# Altium PCB CSB_PCB.PcbDoc
Units mm, origin at the board's own origin, x right, y up, seen from the top; angles counter-clockwise.
Board outline 161.92 x 104.01 mm, 2 copper layers (Top Layer, Bottom Layer); 52 components, 44 nets, 237 pads, 465 vias.
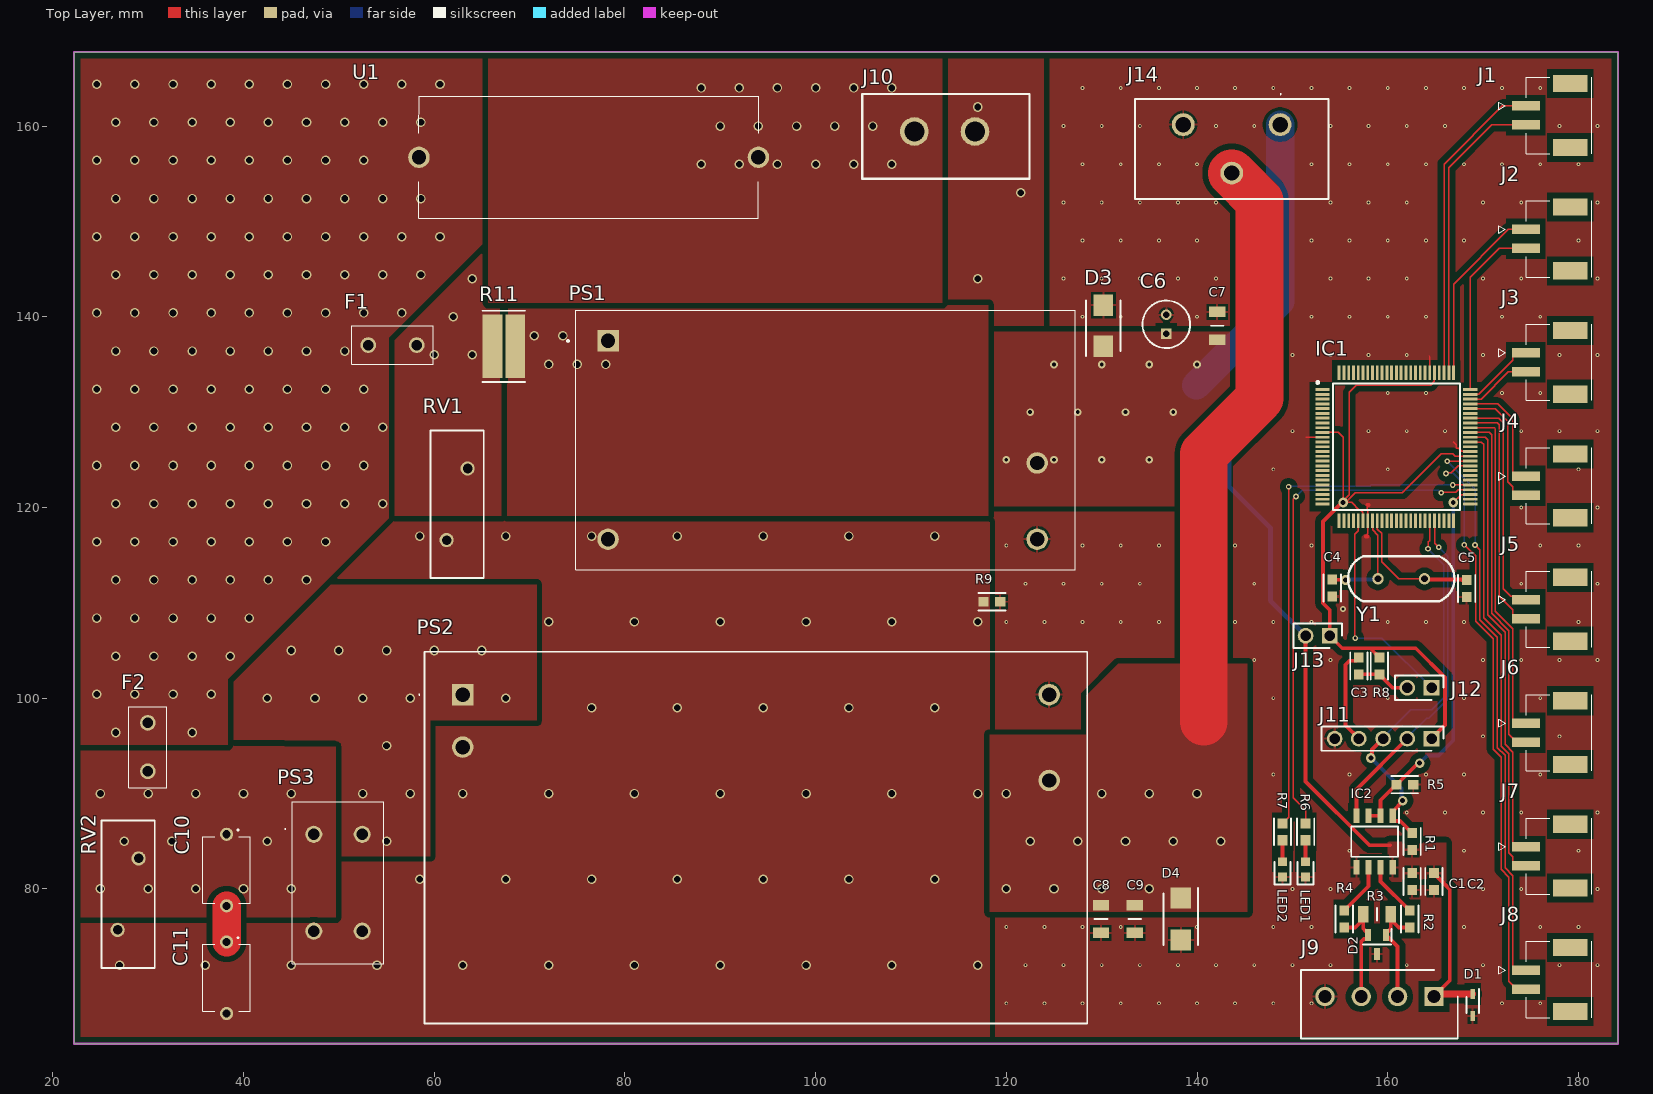
[diagram p0: Top Layer view]
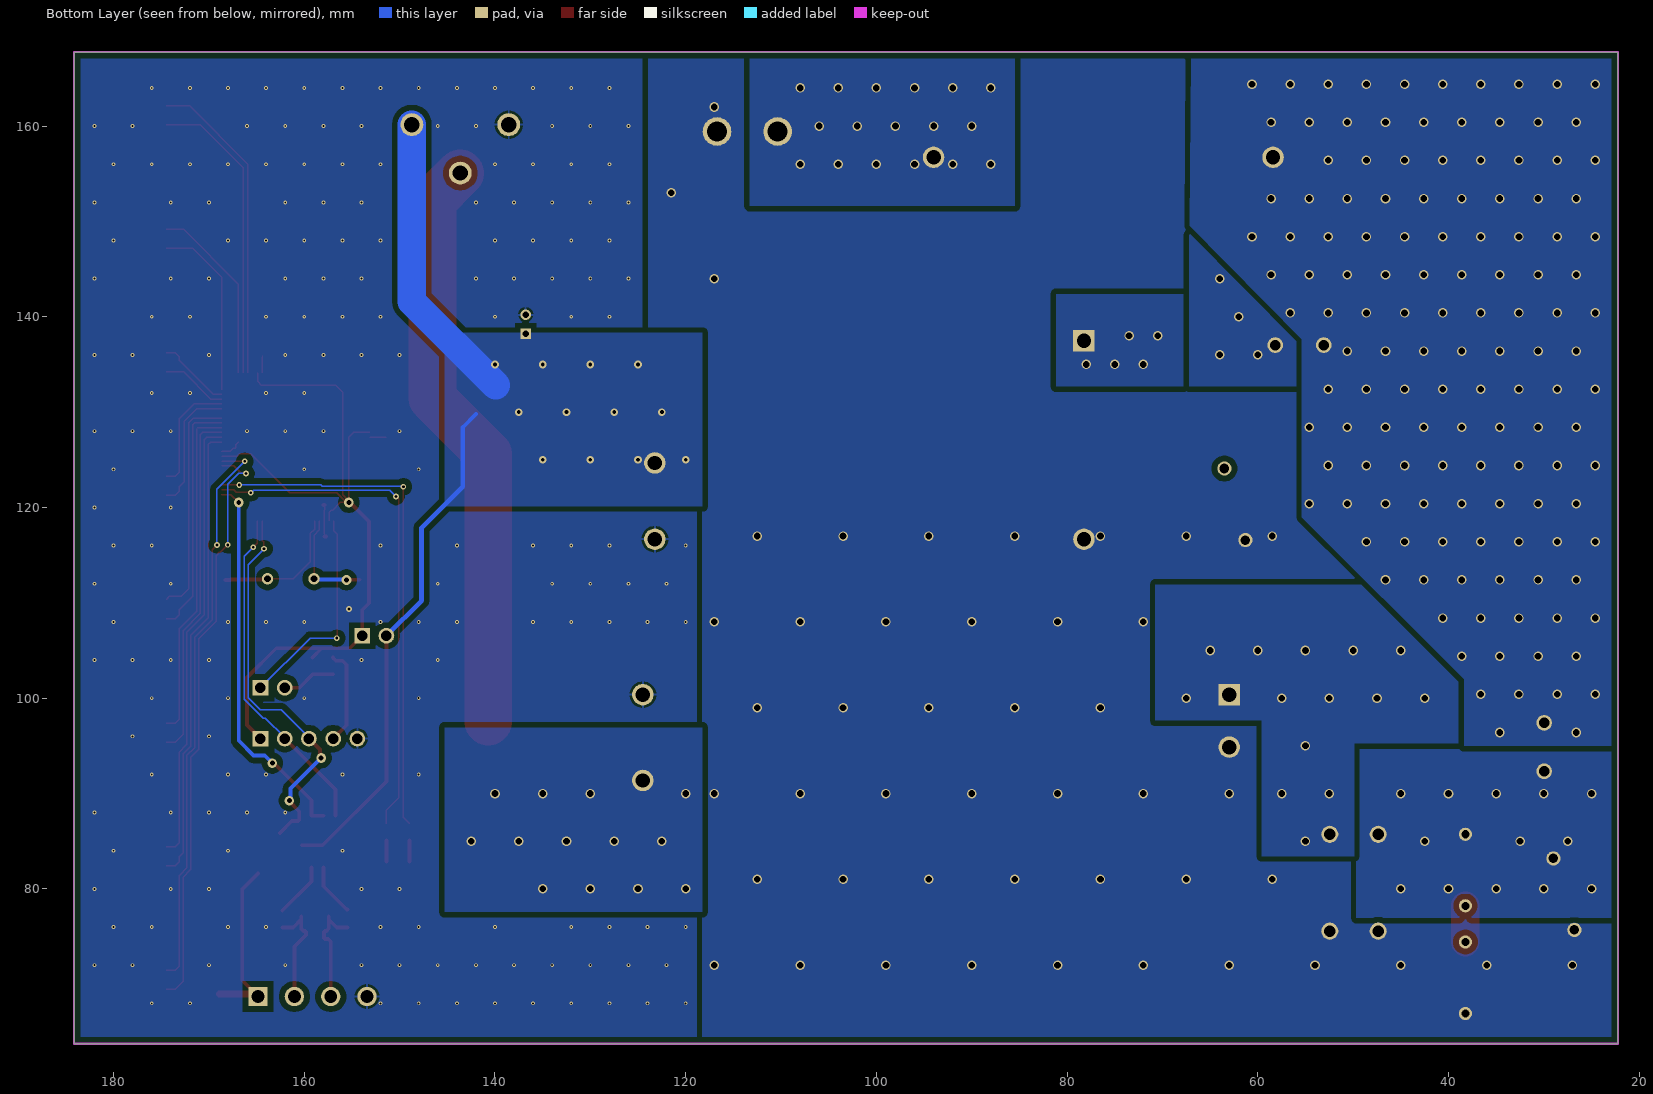
[diagram p1: Bottom Layer view, seen from below]
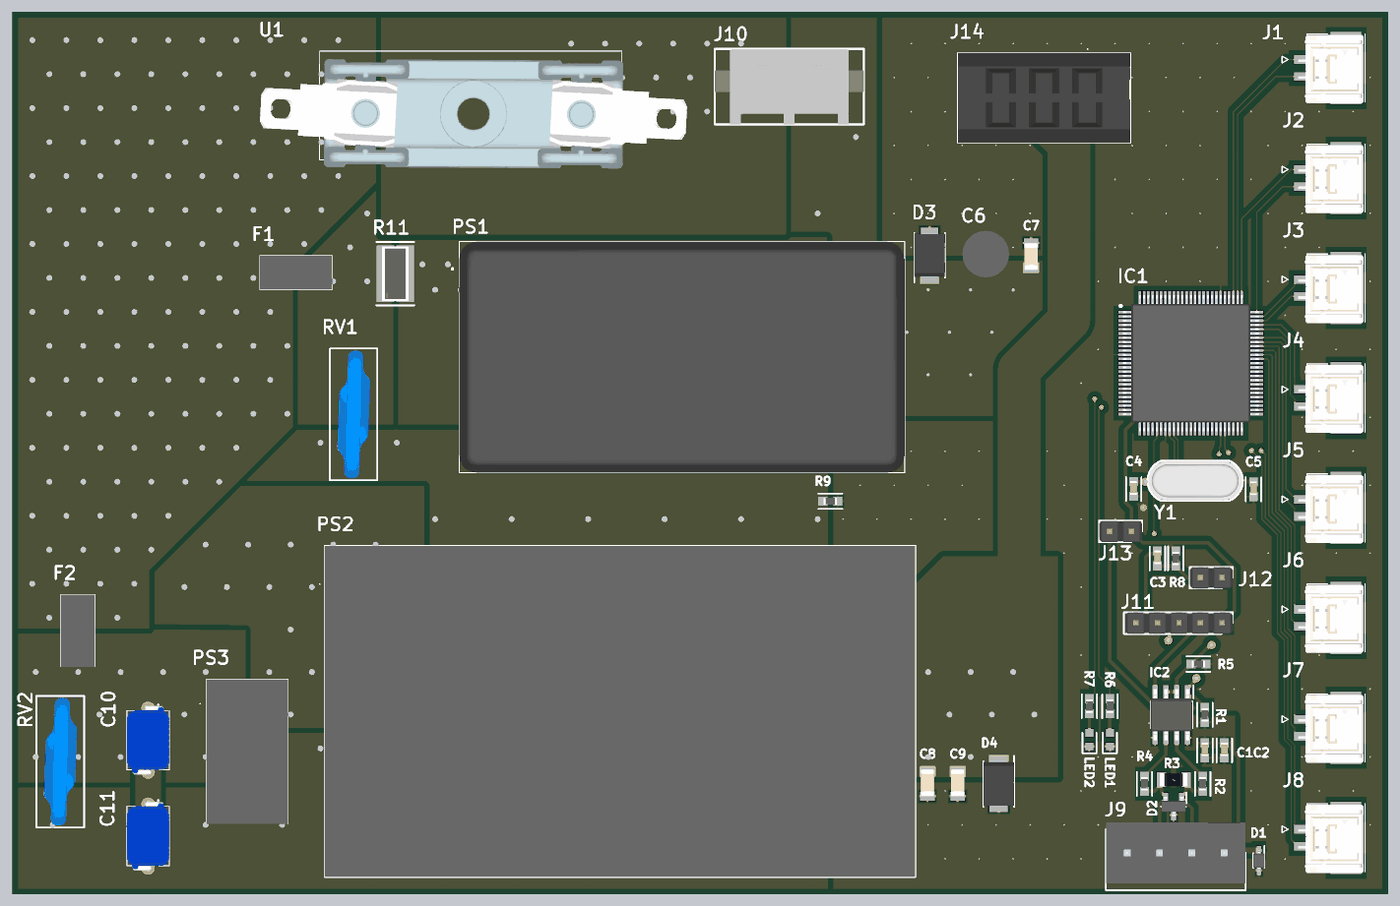
[diagram p2: 3D render of the assembled board from above, using the file's embedded part models]

## Layer stack, top to bottom
Top Solder: solder mask 0.0102, Solder Resist, Dk 3.5
Top Layer: signal copper 0.0356
Dielectric 1: dielectric 0.32, FR-4, Dk 4.8
Bottom Layer: signal copper 0.0356
Bottom Solder: solder mask 0.0102, Solder Resist, Dk 3.5

## Board outline
22.225,63.754 22.225,167.767 184.15,167.767 184.15,63.754

## Design rules (kind name [scope] priority, off if disabled: settings)
Clearance [All] p1: gap=0.254 ignorepadtopadclearanceinfootprint=FALSE except(0: Arc-Hole Track-Hole SMDPad-Hole THPad-Hole Via-Hole Fill-Hole Poly-Hole Region-Hole Text-Hole; 0.1: Arc-Text Track-Text SMDPad-Text THPad-Text Via-Text Fill-Text Poly-Text Region-Text Text-Text; 0.154: SMDPad-SMDPad; 0.4: Arc-THPad Arc-Via Track-THPad Track-Via SMDPad-THPad SMDPad-Via THPad-THPad THPad-Via THPad-Fill THPad-Region Via-Via Via-Fill Via-Region; 0.6: Arc-Poly Track-Poly SMDPad-Poly THPad-Poly Via-Poly Fill-Poly Poly-Poly Poly-Region)
PolygonConnect PolygonConnect_28 [All vs IsNamedPolygon('12V_TOP')] p1: connectstyle=Direct reliefconductorwidth=0.254 reliefentries=4 polygonreliefangle="90 Angle" airgapwidth=0.254
PolygonConnect PolygonConnect_31 [All vs IsNamedPolygon('12V_TOP')] p2: thpad.connectstyle=Direct thpad.reliefconductorwidth=0.254 thpad.reliefentries=4 thpad.polygonreliefangle="90 Angle" thpad.airgapwidth=0.254 smdpad.connectstyle=Relief smdpad.reliefconductorwidth=0.254 smdpad.reliefentries=4 smdpad.polygonreliefangle="90 Angle" smdpad.airgapwidth=0.254 via.connectstyle=Relief via.reliefconductorwidth=0.254 via.reliefentries=4 via.polygonreliefangle="90 Angle" via.airgapwidth=0.254
PolygonConnect PolygonConnect_30 [All vs IsNamedPolygon('12V_TOP')] p3: thpad.connectstyle=Direct thpad.reliefconductorwidth=0.254 thpad.reliefentries=4 thpad.polygonreliefangle="90 Angle" thpad.airgapwidth=0.254 smdpad.connectstyle=Relief smdpad.reliefconductorwidth=0.254 smdpad.reliefentries=4 smdpad.polygonreliefangle="90 Angle" smdpad.airgapwidth=0.254 via.connectstyle=Relief via.reliefconductorwidth=0.254 via.reliefentries=4 via.polygonreliefangle="90 Angle" via.airgapwidth=0.254
PolygonConnect PolygonConnect_29 [All vs IsNamedPolygon('GND_TOP')] p4: thpad.connectstyle=Relief thpad.reliefconductorwidth=0.254 thpad.reliefentries=4 thpad.polygonreliefangle="90 Angle" thpad.airgapwidth=0.254 smdpad.connectstyle=Relief smdpad.reliefconductorwidth=0.254 smdpad.reliefentries=4 smdpad.polygonreliefangle="90 Angle" smdpad.airgapwidth=0.254 via.connectstyle=Direct via.reliefconductorwidth=0.254 via.reliefentries=4 via.polygonreliefangle="90 Angle" via.airgapwidth=0.254
PolygonConnect PolygonConnect_27 [All vs IsNamedPolygon('PS2_1_TOP')] p5: connectstyle=Direct reliefconductorwidth=0.254 reliefentries=4 polygonreliefangle="90 Angle" airgapwidth=0.254
PolygonConnect PolygonConnect_26 [All vs IsNamedPolygon('C10_1_TOP')] p6: connectstyle=Direct reliefconductorwidth=0.254 reliefentries=4 polygonreliefangle="90 Angle" airgapwidth=0.254
PolygonConnect PolygonConnect_25 [All vs IsNamedPolygon('C10_1_BOT')] p7: connectstyle=Direct reliefconductorwidth=0.254 reliefentries=4 polygonreliefangle="90 Angle" airgapwidth=0.254
PolygonConnect PolygonConnect_24 [All vs IsNamedPolygon('PS2_1_BOT')] p8: connectstyle=Direct reliefconductorwidth=0.254 reliefentries=4 polygonreliefangle="90 Angle" airgapwidth=0.254
PolygonConnect PolygonConnect_23 [All vs IsNamedPolygon('C10_1_BOT')] p9: connectstyle=Direct reliefconductorwidth=0.254 reliefentries=4 polygonreliefangle="90 Angle" airgapwidth=0.254
PolygonConnect PolygonConnect_22 [All vs IsNamedPolygon('GND_BOT')] p10: thpad.connectstyle=Relief thpad.reliefconductorwidth=0.254 thpad.reliefentries=4 thpad.polygonreliefangle="90 Angle" thpad.airgapwidth=0.254 smdpad.connectstyle=Relief smdpad.reliefconductorwidth=0.254 smdpad.reliefentries=4 smdpad.polygonreliefangle="90 Angle" smdpad.airgapwidth=0.254 via.connectstyle=Direct via.reliefconductorwidth=0.254 via.reliefentries=4 via.polygonreliefangle="90 Angle" via.airgapwidth=0.254
PolygonConnect PolygonConnect_21 [All vs IsNamedPolygon('GND_TOP')] p11: thpad.connectstyle=Relief thpad.reliefconductorwidth=0.254 thpad.reliefentries=4 thpad.polygonreliefangle="90 Angle" thpad.airgapwidth=0.254 smdpad.connectstyle=Relief smdpad.reliefconductorwidth=0.254 smdpad.reliefentries=4 smdpad.polygonreliefangle="90 Angle" smdpad.airgapwidth=0.254 via.connectstyle=Direct via.reliefconductorwidth=0.254 via.reliefentries=4 via.polygonreliefangle="90 Angle" via.airgapwidth=0.254
PolygonConnect PolygonConnect_20 [All vs IsNamedPolygon('12V_BOT')] p12: connectstyle=Direct reliefconductorwidth=0.254 reliefentries=4 polygonreliefangle="90 Angle" airgapwidth=0.254
PolygonConnect PolygonConnect_19 [All vs IsNamedPolygon('12V_TOP')] p13: connectstyle=Direct reliefconductorwidth=0.254 reliefentries=4 polygonreliefangle="90 Angle" airgapwidth=0.254
PolygonConnect PolygonConnect_18 [All vs IsNamedPolygon('+5V_BOT')] p14: connectstyle=Direct reliefconductorwidth=0.254 reliefentries=4 polygonreliefangle="90 Angle" airgapwidth=0.254
PolygonConnect PolygonConnect_17 [All vs IsNamedPolygon('5V_TOP')] p15: connectstyle=Direct reliefconductorwidth=0.254 reliefentries=4 polygonreliefangle="90 Angle" airgapwidth=0.254
PolygonConnect PolygonConnect_16 [All vs IsNamedPolygon('PGND_TOP')] p16: connectstyle=Direct reliefconductorwidth=0.254 reliefentries=4 polygonreliefangle="90 Angle" airgapwidth=0.254
PolygonConnect PolygonConnect_15 [All vs IsNamedPolygon('PGND_BOT')] p17: connectstyle=Direct reliefconductorwidth=0.254 reliefentries=4 polygonreliefangle="90 Angle" airgapwidth=0.254
PolygonConnect PolygonConnect_14 [All vs IsNamedPolygon('J10_1_TOP')] p18: connectstyle=Direct reliefconductorwidth=0.254 reliefentries=4 polygonreliefangle="90 Angle" airgapwidth=0.254
PolygonConnect PolygonConnect_13 [All vs IsNamedPolygon('PS2_1_BOT')] p19: connectstyle=Direct reliefconductorwidth=0.254 reliefentries=4 polygonreliefangle="90 Angle" airgapwidth=0.254
PolygonConnect PolygonConnect_12 [All vs IsNamedPolygon('PS1_1_BOT')] p20: connectstyle=Direct reliefconductorwidth=0.254 reliefentries=4 polygonreliefangle="90 Angle" airgapwidth=0.254
PolygonConnect PolygonConnect_11 [All vs IsNamedPolygon('F2_2_BOT')] p21: connectstyle=Direct reliefconductorwidth=0.254 reliefentries=4 polygonreliefangle="90 Angle" airgapwidth=0.254
PolygonConnect PolygonConnect_10 [All vs IsNamedPolygon('F1_2_BOT')] p22: connectstyle=Direct reliefconductorwidth=0.254 reliefentries=4 polygonreliefangle="90 Angle" airgapwidth=0.254
PolygonConnect PolygonConnect_9 [All vs IsNamedPolygon('F1_1_BOT')] p23: connectstyle=Direct reliefconductorwidth=0.254 reliefentries=4 polygonreliefangle="90 Angle" airgapwidth=0.254
PolygonConnect PolygonConnect_8 [All vs IsNamedPolygon('J10_1_BOT')] p24: connectstyle=Direct reliefconductorwidth=0.254 reliefentries=4 polygonreliefangle="90 Angle" airgapwidth=0.254
PolygonConnect PolygonConnect_7 [All vs IsNamedPolygon('PS2_1_BOT')] p25: connectstyle=Direct reliefconductorwidth=0.254 reliefentries=4 polygonreliefangle="90 Angle" airgapwidth=0.254
PolygonConnect PolygonConnect_6 [All vs IsNamedPolygon('PS1_1_TOP')] p26: connectstyle=Direct reliefconductorwidth=0.254 reliefentries=4 polygonreliefangle="90 Angle" airgapwidth=0.254
PolygonConnect PolygonConnect_5 [All vs IsNamedPolygon('F2_2_TOP')] p27: connectstyle=Direct reliefconductorwidth=0.254 reliefentries=4 polygonreliefangle="90 Angle" airgapwidth=0.254
PolygonConnect PolygonConnect_4 [All vs IsNamedPolygon('F1_2_TOP')] p28: connectstyle=Direct reliefconductorwidth=0.254 reliefentries=4 polygonreliefangle="90 Angle" airgapwidth=0.254
PolygonConnect PolygonConnect_3 [All vs IsNamedPolygon('F1_1_TOP')] p29: connectstyle=Direct reliefconductorwidth=0.254 reliefentries=4 polygonreliefangle="90 Angle" airgapwidth=0.254
PolygonConnect PolygonConnect_2 [All vs IsNamedPolygon('F1_1_TOP')] p30: connectstyle=Direct reliefconductorwidth=0.254 reliefentries=4 polygonreliefangle="90 Angle" airgapwidth=0.254
PolygonConnect PolygonConnect_1 [All vs IsNamedPolygon('FUSE1_TOP')] p31: connectstyle=Direct reliefconductorwidth=0.254 reliefentries=4 polygonreliefangle="90 Angle" airgapwidth=0.254
PolygonConnect [All] p32: connectstyle=Relief reliefconductorwidth=0.254 reliefentries=4 polygonreliefangle="90 Angle" airgapwidth=0.254
RoutingVias [All] p1: holewidth=0.711 width=1.27 viastyle="Through Hole" minholewidth=0.711 minwidth=1.27 maxholewidth=0.711 maxwidth=1.27
SilkToSolderMaskClearance [IsText] p1: minsilkscreentomaskgap=0.254 clearancetoexposedcopper=TRUE
SolderMaskExpansion [All] p1: expansion=0.102 istentingtop=FALSE
Width Width_C10_2 [InNet('NetC10_2')] p1: maxlimit=5 minlimit=0.254 preferedwidth=0.254 minimp=50.000000 maximp=50.000000 favimp=50.000000
Width Width_12V [InNet('+12V')] p2: maxlimit=6 minlimit=5 preferedwidth=5 minimp=50.000000 maximp=50.000000 favimp=50.000000
Width Width_5V [InNet('+5V')] p3: maxlimit=5 minlimit=0.4 preferedwidth=3 minimp=50.000000 maximp=50.000000 favimp=50.000000
Width Width_General [All] p4: maxlimit=0.4 minlimit=0.154 preferedwidth=0.254 minimp=50.000000 maximp=50.000000 favimp=50.000000 checkconnectedcopper=TRUE
29 further rules are at their usual default settings.

## Classes and differential pairs
component class Voltage_generation: C6 C7 C8 C9 C10 C11 D3 D4 F1 F2 J10 J14 PS1 PS3 R9 R11 RV1 RV2 U1
component class uC_assembly: C1 C2 C3 C4 C5 D1 D2 IC1 IC2 J1 J2 J3 J4 J5 J6 J7 J8 J9 J11 J12 J13 LED1 LED2 R1 R2 R3 R4 R5 R6 R7 R8 Y1

## Components (designator, comment, footprint, x,y, rotation, side; value= is the part's Value field where it differs from the comment)
C1 "100nF" 0603C 162.56,80.772 r90 top
C2 "100nF" 0603C 164.846,80.772 r90 top
C3 "100nF" 0603C 156.972,103.378 r90 top
C4 "22pF" 0603C 154.178,111.553 r90 top
C5 "22pF" 0603C 168.275,111.506 r90 top
C6 "10uF/16V" CAPPRD200W52D500H1250 136.779,138.208 r90 top
C7 "1uF" 1206C 142.113,139.058 r270 top
C8 "1uF" 1206C 129.921,76.835 r90 top
C9 "10uF" 1206C 133.477,76.835 r90 top
C10 "1nF" C907U102MYVDBA7317 38.227,85.725 r270 top
C11 "1nF" C907U102MYVDBA7317 38.227,74.429 r270 top
D1 "SD05-7" SOD2513X120N 168.91,67.818 r270 top
D2 "CDSOT23-SM712" SOT95P230X117-3N 158.877,74.168 r270 top
D3 "SMBJ7.0A" DIOM5336X244N 130.175,139.065 r90 top
D4 "SMBJ20A-E3_52" DIOM5436X244N 138.303,76.835 r270 top
F1 "36913150000" 36913150000 53.086,137.033 r0 top
F2 "36913150000" 36913150000 29.972,97.409 r270 top
IC1 "ATMEGA2560-16AU" QFP50P1600X1600X120-100N 160.909,126.365 r0 top
IC2 "THVD1520" SOIC127P600X175-8N 158.623,84.963 r270 top
J1 "5024430270" MOLEX_5024430270 177.546,161.115 r270 top
J2 "5024430270" MOLEX_5024430270 177.546,148.168 r270 top
J3 "5024430270" MOLEX_5024430270 177.546,135.221 r270 top
J4 "5024430270" MOLEX_5024430270 177.546,122.274 r270 top
J5 "5024430270" MOLEX_5024430270 177.546,109.326 r270 top
J6 "5024430270" MOLEX_5024430270 177.546,96.379 r270 top
J7 "5024430270" MOLEX_5024430270 177.546,83.432 r270 top
J8 "5024430270" MOLEX_5024430270 177.546,70.485 r270 top
J9 "691321300004" SHDR4W80P0X381_1X4_1643X720X920P 164.846,68.707 r180 top
J10 "0010845021" 0010845021_MOLEX 113.538,159.429 r0 top
J11 "MOLEX,_C-GRID_III,_90120,_8_WAY,_1_ROW,_STRAIGHT_PIN_HEADER" "HDRV8W65P0X254_1X8_2010X249X945P - duplicate" 164.592,95.758 r180 top
J12 "PIN_HEADER_2" PINHEADER2 164.592,101.092 r180 top
J13 "PIN_HEADER_2" PINHEADER2 153.924,106.553 r180 top
J14 "02529031301" 02529031301 148.717,160.147 r0 top
LED1 "LTST-C191KFKT" LEDC1608X55N 151.384,82.042 r90 top
LED2 "LTST-C191KFKT" LEDC1608X55N 148.971,82.042 r90 top
PS1 "LD20-23B05R2" CONV_LD20-23B05R2 101.032,127.072 r0 top
PS2 "LD30-23B12R2" LD3023B12R2 62.992,100.369 r0 top
PS3 "FL2D-Z5-103" FL2DZ5103 47.371,85.725 r270 top
R1 "10K" 0603R 162.56,84.963 r270 top
R2 "10" 0603R 162.306,76.835 r270 top
R3 "120" 1206R 158.877,77.343 r180 top
R4 "10" 0603R 155.448,76.835 r270 top
R5 "10K" 0603R 161.798,90.932 r180 top
R6 "330" 0603R 151.384,85.979 r90 top
R7 "330" 0603R 148.971,85.979 r90 top
R8 "10K" 0603R 159.131,103.378 r270 top
R9 "0 ohm" 0603R 118.491,110.109 r180 top
R11 "3Ohms/3W" Rohm_LTR100_IPC_A 67.31,136.906 r180 top
RV1 "B72214S0351K101" B72214S0351K101 61.3,116.586 r90 top
RV2 "B72214S0351K101" B72214S0351K101 26.797,75.692 r90 top
U1 "03540001ZXGY" Fuse_1 76.2,156.718 r0 top
Y1 "LFXTAL003240" IQD-HC-49-4H 161.417,112.522 r0 top

## Footprints (in the part's own frame and the unit in brackets; to place one, negate y for a bottom-side part, rotate by r counter-clockwise, add the part's x,y. Pads: shape width x height; smd on the part's side, far side on the other; paste and mask are expansions set on the pad)
0603C [mm]
  rect 1.059x1.012 smd paste+0 mask+0: 1(-0.877,0) 2(0.877,0)
  silkscreen extent -1.41,-0.91 1.41,0.91, body extent -0.67,-0.4 0.93,0.4, height 0.6
0603R [mm]
  rect 1.059x1.012 smd paste+0 mask+0: 1(-0.877,0) 2(0.877,0)
  silkscreen extent -1.41,-0.91 1.41,0.91, body extent -1.91,-1.01 1.91,1.01, height 0.25
1206C [mm]
  rect 1.1x1.7 smd: 1(-1.45,0) 2(1.45,0)
  silkscreen extent 0,-0.67 0,0.67, body extent -1.47,-0.8 1.73,0.8, height 0.81
1206R [mm]
  rect 1.1x1.7 smd: 1(-1.45,0) 2(1.45,0)
  silkscreen extent 0,-0.67 0,0.67, body extent -1.6,-0.76 1.6,0.84, height 0.6
0010845021_MOLEX [mm]
  round 3 hole 2.1 mask+0: 1(-3.175,0) 2(3.175,0)
  silkscreen extent -8.64,-4.94 8.89,3.94, body extent -8.64,-4.95 8.89,3.94, height 14.98
02529031301 [mm]
  round 2.4 hole 1.6: 1(0,0) 2(-5.08,-5.08) 3(-10.16,0)
  silkscreen extent -15.22,-7.79 5.06,3.25, body extent -15.22,-7.79 5.06,2.71, height 12.11
36913150000 [mm]
  round 1.65 hole 1.1: 1(0,0) 2(5.08,0)
  silkscreen extent -1.71,-2 6.79,2, body extent -1.71,-2 6.79,2, height 8.1
B72214S0351K101 [mm]
  round 1.5 hole 1: 1(0,0) 2(7.5,-2.2)
  silkscreen extent -4,-3.9 11.5,1.7, body extent -3.81,-3.18 11.3,0.94, height 17.5
C907U102MYVDBA7317 [mm]
  round 1.381 hole 0.85: 1(0,0) 2(7.5,0)
  silkscreen extent -0.5,-2.5 7.25,2.5, body extent -0.33,-2.5 7.83,2.5, height 10.79
CAPPRD200W52D500H1250 [mm]
  rect 1.1x1.1 hole 0.7: 1(0,0)
  round 1.1 hole 0.7: 2(2,0)
  silkscreen extent -1.5,-2.5 3.5,2.5, body extent -1.74,-2.75 3.75,2.75, height 12.5
CONV_LD20-23B05R2 [mm]
  rect 2.25x2.25 hole 1.5: 1(-22.8,10.4)
  round 2.25 hole 1.5: 2(-22.8,-10.4) 3(22.2,-10.4) 4(22.2,-2.4)
  silkscreen extent -27.1,-13.6 26.2,13.6, body extent -26.2,-13.6 26.2,13.6, height 24
DIOM5336X244N [mm]
  rect 2.25x2.05 smd: 1(-2.15,0) 2(2.15,0)
  silkscreen extent -3.17,-1.81 2.64,1.81, body extent -2.64,-1.81 2.64,1.81, height 2.44
DIOM5436X244N [mm]
  rect 2.2x2.15 smd: 1(-2.2,0) 2(2.2,0)
  silkscreen extent -3.27,-1.81 2.7,1.81, body extent -2.7,-1.81 2.7,1.81, height 2.44
FL2DZ5103 [mm]
  round 1.8 hole 1.2: 1(0,0) 2(10.16,0) 3(10.16,5.08) 4(0,5.08)
  silkscreen extent -3.42,-3.05 13.58,7.34, body extent -3.42,-2.26 13.58,7.34, height 18.1
Fuse_1 [mm]
  round 2.25 hole 1.5: 1(-17.8,0) 2(17.8,0)
  silkscreen extent -17.8,-6.4 17.8,6.4, body extent -25.08,-9.45 25.7,7.45, height 13.65
"HDRV8W65P0X254_1X8_2010X249X945P - duplicate" [mm]
  rect 1.65x1.65 hole 1.1: 1(0,0)
  round 1.65 hole 1.1: 2(2.54,0) 3(5.08,0) 4(7.62,0) 5(10.16,0)
  silkscreen extent -1.27,-1.27 11.56,1.27, body extent -1.27,-1.27 11.43,1.27, height 9.5
IQD-HC-49-4H [mm]
  round 1.2 hole 0.7: 1(-2.44,0) 2(2.44,0)
  silkscreen extent -5.59,-2.35 5.59,2.35, body extent -5.53,-2.35 5.53,2.35, height 5.24
LD3023B12R2 [mm]
  rect 2.25x2.25 hole 1.5: 1(0,0)
  round 2.25 hole 1.5: 2(0,-5.5) 3(61.5,-9) 4(61.5,0)
  silkscreen extent -4.6,-34.5 65.5,4.5, body extent -4,-34.5 65.5,4.5, height 24.6
LEDC1608X55N [mm]
  rect 0.9x0.95 smd: 1(-0.8,0) 2(0.8,0)
  silkscreen extent -1.6,-0.82 0.8,0.82
MOLEX_5024430270 [mm]
  rect 1x2.9 smd mask+0.076: 1(-1,-3.05) 2(1,-3.05)
  rect 1.8x3.6 smd mask+0.076: S1(-3.35,1.6) S2(3.35,1.6)
  silkscreen extent -4,-5.9 4,3.85, body extent -3.87,-4.02 4.13,3.68, height 7.7
PINHEADER2 [mm]
  rect 1.65x1.65 hole 1.1: 1(0,0)
  round 1.65 hole 1.1: 2(2.54,0)
  silkscreen extent -1.27,-1.27 3.81,1.27, body extent -1.27,-1.27 3.81,1.27, height 9.5
QFP50P1600X1600X120-100N [mm]
  rect 1.5x0.3 smd: 1(-7.75,6) 2(-7.75,5.5) 3(-7.75,5) 4(-7.75,4.5) 5(-7.75,4) 6(-7.75,3.5) 7(-7.75,3) 8(-7.75,2.5) 9(-7.75,2) 10(-7.75,1.5) 11(-7.75,1) 12(-7.75,0.5) 13(-7.75,0) 14(-7.75,-0.5) 15(-7.75,-1) 16(-7.75,-1.5) 17(-7.75,-2) 18(-7.75,-2.5) 19(-7.75,-3) 20(-7.75,-3.5) 21(-7.75,-4) 22(-7.75,-4.5) 23(-7.75,-5) 24(-7.75,-5.5) 25(-7.75,-6) 51(7.75,-6) 52(7.75,-5.5) 53(7.75,-5) 54(7.75,-4.5) 55(7.75,-4) 56(7.75,-3.5) 57(7.75,-3) 58(7.75,-2.5) 59(7.75,-2) 60(7.75,-1.5) 61(7.75,-1) 62(7.75,-0.5) 63(7.75,0) 64(7.75,0.5) 65(7.75,1) 66(7.75,1.5) 67(7.75,2) 68(7.75,2.5) 69(7.75,3) 70(7.75,3.5) 71(7.75,4) 72(7.75,4.5) 73(7.75,5) 74(7.75,5.5) 75(7.75,6)
  rect 0.3x1.5 smd: 26(-6,-7.75) 27(-5.5,-7.75) 28(-5,-7.75) 29(-4.5,-7.75) 30(-4,-7.75) 31(-3.5,-7.75) 32(-3,-7.75) 33(-2.5,-7.75) 34(-2,-7.75) 35(-1.5,-7.75) 36(-1,-7.75) 37(-0.5,-7.75) 38(0,-7.75) 39(0.5,-7.75) 40(1,-7.75) 41(1.5,-7.75) 42(2,-7.75) 43(2.5,-7.75) 44(3,-7.75) 45(3.5,-7.75) 46(4,-7.75) 47(4.5,-7.75) 48(5,-7.75) 49(5.5,-7.75) 50(6,-7.75) 76(6,7.75) 77(5.5,7.75) 78(5,7.75) 79(4.5,7.75) 80(4,7.75) 81(3.5,7.75) 82(3,7.75) 83(2.5,7.75) 84(2,7.75) 85(1.5,7.75) 86(1,7.75) 87(0.5,7.75) 88(0,7.75) 89(-0.5,7.75) 90(-1,7.75) 91(-1.5,7.75) 92(-2,7.75) 93(-2.5,7.75) 94(-3,7.75) 95(-3.5,7.75) 96(-4,7.75) 97(-4.5,7.75) 98(-5,7.75) 99(-5.5,7.75) 100(-6,7.75)
  silkscreen extent -8.37,-6.65 6.65,6.87, body extent -8,-8 8,8, height 1.2
Rohm_LTR100_IPC_A [mm]
  rect 2.086x6.658 smd paste+0 mask+0: 1(-1.186,0) 2(1.186,0)
  silkscreen extent -2.23,-3.73 2.23,3.73, body extent -2.73,-3.83 2.73,3.83, height 0.25
SHDR4W80P0X381_1X4_1643X720X920P [mm]
  rect 2.025x2.025 hole 1.35: 1(0,0)
  round 2.025 hole 1.35: 2(3.81,0) 3(7.62,0) 4(11.43,0)
  silkscreen extent -2.5,-2.8 13.93,4.4, body extent -2.5,-3.6 13.93,3.6, height 9.2
SOD2513X120N [mm]
  rect 1.075x0.5 smd: 1(-1.162,0) 2(1.162,0)
  silkscreen extent -1.7,-0.65 0.85,0.65, body extent -1.25,-0.65 1.25,0.65, height 1.2
SOIC127P600X175-8N [mm]
  rect 1.528x0.65 smd: 1(-2.711,1.905) 2(-2.711,0.635) 3(-2.711,-0.635) 4(-2.711,-1.905) 5(2.711,-1.905) 6(2.711,-0.635) 7(2.711,0.635) 8(2.711,1.905)
  silkscreen extent -3.47,-2.45 1.6,2.58, body extent -3.01,-2.45 3.01,2.45, height 1.63
SOT95P230X117-3N [mm]
  rect 1.25x0.6 smd: 1(-1,0.95) 2(-1,-0.95) 3(1,0)
  silkscreen extent -1.63,-1.45 0.03,1.5, body extent -1.15,-1.45 1.15,1.45, height 1.17

## Part data
C1 C2 C3: library part Ceramic_Capacitor, "Cap Ceramic 22pF", Manufacturer=Kyocera, Manufacturer Part Number=KGM15BR71E104KT
C4 C5: library part Ceramic_Capacitor, "Cap Ceramic 22pF", Manufacturer=Kyocera, Manufacturer Part Number=KGM15ACG1C220KT
C6: library part 860010372001, "Capacitor Polarised", Manufacturer_Name="Wurth Elektronik", Mouser Part Number=710-860010372001, Datasheet Link=https://ms.componentsearchengine.com/Datasheets/2/860010372001.pdf, Height=12.5mm, Manufacturer_Part_Number=860010372001, Mouser Price/Stock=https://www.mouser.co.uk/ProductDetail/Wurth-Elektronik/860010372001?qs=0KOYDY2FL29NKHIi2kspeA%3D%3D
C7: library part Ceramic_Capacitor, "1 µF ±10% 50V Capacitores cerámicos X7R 1206 (3216 métrico)", Manufacturer=Samsung, Manufacturer Part Number=CL31B105KBHNNNE
C8: library part Ceramic_Capacitor, "1 µF ±10% 50V Capacitores cerámicos X7R 1206 (3216 métrico)", Manufacturer=Samsung, Manufacturer Part Number=CL31B105KCHSNNE
C9: library part Ceramic_Capacitor, "1 µF ±10% 50V Capacitores cerámicos X7R 1206 (3216 métrico)", Manufacturer=Samsung, Manufacturer Part Number=CL31A106MBHNNNE
C10 C11: library part C907U102MYVDBA7317, "Capacitor", Manufacturer_Name=KEMET, Mouser Part Number=80-C907U102MYVDBAP, Arrow Part Number=C907U102MYVDBA7317, Arrow Price/Stock=https://www.arrow.com/en/products/c907u102myvdba7317/kemet-corporation, Datasheet Link=https://content.kemet.com/datasheets/KEM_C1064_X1_400_VAC_Y2_250_VAC.pdf, Height=7mm, Manufacturer_Part_Number=C907U102MYVDBA7317, Mouser Price/Stock=https://www.mouser.co.uk/ProductDetail/KEMET/C907U102MYVDBA7317?qs=gqcQgTT0fkjWEB%2FDOlQ0cA%3D%3D
D1: "TVS Diode (Uni-directional)", Manufacturer_Name="Diodes Inc.", Mouser Part Number=621-SD05-7, Arrow Part Number=SD05-7, Arrow Price/Stock=https://www.arrow.com/en/products/sd05-7/diodes-incorporated, Datasheet Link=http://uk.rs-online.com/web/p/products/7514922P, Height=1.2mm, Manufacturer_Part_Number=SD05-7, Mouser Price/Stock=https://www.mouser.co.uk/ProductDetail/Diodes-Incorporated/SD05-7?qs=nSryOFbzj8LxrCClYHHrlA%3D%3D
D2: "Diode", Manufacturer_Name=Bourns, Mouser Part Number=652-CDSOT23-SM712, Arrow Part Number=CDSOT23-SM712, Arrow Price/Stock=https://www.arrow.com/en/products/cdsot23-sm712/bourns?region=europe, Datasheet Link=http://uk.rs-online.com/web/p/products/7673728, Height=1.17mm, Manufacturer_Part_Number=CDSOT23-SM712, Mouser Price/Stock=https://www.mouser.co.uk/ProductDetail/Bourns/CDSOT23-SM712?qs=FuI%252BOVLl4%2FLTY%2FGQ265RLA%3D%3D
D3: "Diode", Manufacturer_Name="HY Electronic", Height=2.44mm, Manufacturer_Part_Number=SMBJ7.0A
D4: "TVS Diode (Uni-directional)", Arrow Part Number=SMBJ20A-E3/52, Manufacturer_Name=Vishay, Mouser Part Number=625-SMBJ20A-E3, Arrow Price/Stock=https://www.arrow.com/en/products/smbj20a-e352/vishay?region=nac, Datasheet Link=http://www.vishay.com/docs/88392/smbj.pdf, Height=2.44mm, Manufacturer_Part_Number=SMBJ20A-E3/52, Mouser Price/Stock=https://www.mouser.co.uk/ProductDetail/Vishay-General-Semiconductor/SMBJ20A-E3-52?qs=%252BKsK5HlK7GGHijeGSDEfxQ%3D%3D
F1 F2: "Fuse", Manufacturer_Name=LITTELFUSE, Mouser Part Number=576-36913150000, Arrow Part Number=36913150000, Arrow Price/Stock=https://www.arrow.com/en/products/36913150000/littelfuse?region=nac, Datasheet Link=https://componentsearchengine.com/Datasheets/1/36913150000.pdf, Height=8mm, Manufacturer_Part_Number=36913150000, Mouser Price/Stock=https://www.mouser.co.uk/ProductDetail/Littelfuse/36913150000?qs=A0AD9A9uYPZCz%252Bhb2n2Ctg%3D%3D
IC1: "Integrated Circuit", Manufacturer_Name=Microchip, Mouser Part Number=556-ATMEGA2560-16AU, Arrow Part Number=ATMEGA2560-16AU, Arrow Price/Stock=https://www.arrow.com/en/products/atmega2560-16au/microchip-technology?region=nac, Datasheet Link=https://datasheet.datasheetarchive.com/originals/distributors/Datasheets_SAMA/4a5a397fa76c39b5297f4121ace1d84e.pdf, Height=1.2mm, Manufacturer_Part_Number=ATMEGA2560-16AU, Mouser Price/Stock=https://www.mouser.co.uk/ProductDetail/Microchip-Technology/ATMEGA2560-16AU?qs=aqrrBurbvGciYmlAokFS0w%3D%3D
IC2: "Integrated Circuit", Manufacturer_Name="Texas Instruments", Arrow Part Number=THVD1520, Arrow Price/Stock=https://www.arrow.com/en/products/thvd1520/texas-instruments, Datasheet Link=https://www.ti.com/lit/ds/symlink/thvd1520.pdf?ts=1621063667522&ref_url=https%253A%252F%252Fwww.google.com%252F, Height=1.75mm, Manufacturer_Part_Number=THVD1520
J1 J2 J3 J4 J5 J6 J7 J8: "2.00mm Pitch CLIK-Mate Wire-to-Board PCB Receptacle, Single Row, Vertical, with Cover Tape, 2 Circuits", Package=None, Availability=Unavailable, MP=5024430270, Price=None
J9: "Connector", Manufacturer_Name="Wurth Elektronik", Mouser Part Number=710-691321300004, Datasheet Link=http://katalog.we-online.de/em/datasheet/6913213000xx.pdf, Height=9.2mm, Manufacturer_Part_Number=691321300004, Mouser Price/Stock=https://www.mouser.co.uk/ProductDetail/Wurth-Elektronik/691321300004?qs=2kOmHSv6VfS%252BzUmRw3eoyg%3D%3D
J10: "Connector", Manufacturer=MOLEX, Manufacturer Part Number=0010845021
J11 J12 J13: "Connector", Manufacturer_Name=Molex, Manufacturer_Part_Number=MOLEX, Datasheet Link=https://www.molex.com/pdm_docs/sd/901200128_sd.pdf, Height=9.45mm
J14: "Connector", Manufacturer_Name=HARTING, Mouser Part Number=617-02529031301, Datasheet Link=https://b2b.harting.com/files/download/PRD/PDF_DS/PDF_DS_02529031301_EN.pdf, Height=11.6mm, Manufacturer_Part_Number=02529031301, Mouser Price/Stock=https://www.mouser.co.uk/ProductDetail/HARTING/02529031301?qs=pUKx8fyJudBResgWdfe%2F7g%3D%3D
LED1: "LED", Manufacturer=Lite-On, Manufacturer Part Number=LTST-C191KFKT
LED2: "LED", Manufacturer=Lite-On, Manufacturer Part Number=LTST-C191KGKT
PS1: "Enclosed AC DC Converters 1 Uitgang 5V - - - 4A 85 ~ 305 VAC, 100 ~ 430 VDC Input", Manufacturer="Mornsun America, LLC", Package="CUSTOM-4 MORNSUN", Check_prices=https://www.snapeda.com/parts/LD20-23B05R2/MORNSUN/view-part/?ref=eda, Digi-Key_Part_Number=2725-LD20-23B05R2-ND, Manufacturer Part Number=LD20-23B05R2, Purchase-URL=https://pricing.snapeda.com/search/part/LD20-23B05R2/?ref=eda, SnapEDA_Link=https://www.snapeda.com/parts/LD20-23B05R2/MORNSUN/view-part/?ref=snap
PS2 PS3: "Power Supply", Manufacturer_Name="Mornsun Power"
  PS2: Datasheet Link=https://www.mornsun-power.com/html/pdf/LD30-23B12R2.html, Height=24.5mm, Manufacturer_Part_Number=LD30-23B12R2
  PS3: Datasheet Link=https://datasheet.lcsc.com/szlcsc/1811091611_MORNSUN-Guangzhou-S-T-FL2D-Z5-103_C191603.pdf, Height=18mm, Manufacturer_Part_Number=FL2D-Z5-103
R1 R5 R8: library part Resistor, Manufacturer=Yageo, Manufacturer Part Number=RC0603FR-1010KL
R2 R4: library part Resistor, Manufacturer=Yageo, Manufacturer Part Number=RC0603FR-0710RL
R3: library part Resistor, Manufacturer=Yageo, Manufacturer Part Number=RC1206FR-07120RL
R6 R7: library part Resistor, Manufacturer=Yageo, Manufacturer Part Number=RC0603FR-10330RL
R9: library part Resistor, Manufacturer=Yageo, Manufacturer Part Number=RC0603FR-070RL
R11: library part Resistor, "3 Ohms ±5% 3W Resistencia en microprocesador Ancho 2512 (6432 métrico), 1225 AEC-Q200 automotriz, protección contra impulsos Película gruesa", Manufacturer=Rohm, Manufacturer Part Number=LTR100JZPJ3R0
RV1 RV2: "Varistor", Manufacturer_Name=TDK, Arrow Part Number=B72214S0351K101, Arrow Price/Stock=https://www.arrow.com/en/products/b72214s0351k101/epcos-tdk?region=nac, Datasheet Link=https://product.tdk.com/system/files/dam/doc/product/protection/voltage/lead-disk-varistor/data_sheet/70/db/var/siov_leaded_standard.pdf, Height=18.5mm, Manufacturer_Part_Number=B72214S0351K101
U1: "Undefined or Miscellaneous", Manufacturer_Name=LITTELFUSE, Mouser Part Number=576-03540001ZXGY, Arrow Part Number=03540001ZXGY, Arrow Price/Stock=https://www.arrow.com/en/products/03540001zxgy/littelfuse?region=nac, Datasheet Link=https://m.littelfuse.com/~/media/electronics/datasheets/fuse_blocks/littelfuse_fuse_block_354_datasheet.pdf.pdf, Height=13mm, Manufacturer_Part_Number=03540001ZXGY, Mouser Price/Stock=https://www.mouser.co.uk/ProductDetail/Littelfuse/03540001ZXGY?qs=2VFNtWizgieffhgauIF6XA%3D%3D
Y1: "Crystal or Oscillator", Manufacturer_Name=IQD, Manufacturer_Part_Number=LFXTAL003240

## Via types
v1: diameter 1, hole 0.7, Top Layer to Bottom Layer, tented both sides, 243 vias
v2: diameter 0.4, hole 0.2, Top Layer to Bottom Layer, tented both sides, 192 vias
v3: diameter 0.6, hole 0.3, Top Layer to Bottom Layer, 12 vias
v4: diameter 0.8, hole 0.4, Top Layer to Bottom Layer, tented both sides, 12 vias
v5: diameter 1, hole 0.5, Top Layer to Bottom Layer, 6 vias

## Nets (pads, with @x,y where several pads share a name; then routed paths per layer and width w, separated by ;. In a path a pad name is that pad's centre, name@x,y a point inside that pad or via, vN(x,y) a via of type N, cw(c..) or ccw(c..) an arc to the next point about the centre after c; other vN are vias at no path point)
+5V: C1.2 C2.2 C6.1 C7.2 D1.1 D3.1 IC2.8 J9.1 J13.2 J14.1 PS1.4 R1.2 | length 102.8
  Top Layer w0.4: J13.2 151.384,91.277 158.079,84.582 160.274,84.582 ; J9.1 166.497,70.358 166.497,79.974 164.846,81.625 C2.2
  Top Layer w0.7: J9.1@165.481,68.98 D1.1
  Bottom Layer w0.4: 141.986,129.794 143.383,128.397
  Bottom Layer w0.5: 143.383,128.397 143.383,122.174 147.701,117.856 147.701,110.236 J13.2
  Bottom Layer w3: 139.914,132.802 148.717,141.605 J14.1
  other v4: 120,125 125,125 130,125 135,125 122.5,130 127.5,130 132.5,130 137.5,130 125,135 130,135 135,135 140,135
+5V_uC: IC1.10 IC1.31 IC1.61 IC1.80 J11.1 J13.1 R8.1 | length 87.4
  Top Layer w0.154: IC1.10 154.837,127.865 155.321,127.381 155.321,120.685 155.956,121.32 155.956,132.08 156.718,132.842 164.504,132.842 164.89,133.228 164.89,134.096 IC1.80 ; v5(155.321,120.523) v5@155.575,120.523 ; IC1.31 157.39,118.634 157.39,119.502 157.196,119.696 157.037,119.696 156.21,120.523 v5@155.575,120.523 ; IC1.61 167.09,125.365 166.837,125.618 165.623,125.618 161.544,121.539 156.591,121.539 155.811,120.759 155.786,120.759 155.575,120.548 v5@155.575,120.523
  Top Layer w0.4: v5@155.321,120.685 v5(155.321,120.523) 155.194,120.523 153.218,118.547 153.218,109.959 153.924,109.253 J13.1 155.239,105.238 158.171,105.238 ; R8.1 159.131,104.278 158.171,105.238 ; J11.1 166.017,97.183 166.017,102.166 162.944,105.238 158.171,105.238
+12V: C8.2 C9.2 D4.1 J14.2 PS2.3 | length 61.2
  Top Layer w5: 140.716,97.536 140.716,125.603 146.558,131.445 146.558,152.146 J14.2
  other v1: 120,80 125,80 130,80 135,80 122.5,85 127.5,85 132.5,85 137.5,85 142.5,85 120,90 130,90 135,90 140,90
BK0: IC1.77 J1.2 | length 31.5
  Top Layer w0.154: IC1.77 166.409,155.614 170.91,160.115 J1.2
BK1: IC1.75 J2.2 | length 18.9
  Top Layer w0.154: IC1.75 168.659,144.148 171.679,147.168 J2.2
BK2: IC1.73 J3.2 | length 7
  Top Layer w0.154: IC1.73 169.79,131.365 172.646,134.221 J3.2
BK3: IC1.71 J4.2 | length 13.6
  Top Layer w0.154: IC1.71 168.678,130.346 171.279,130.346 172.593,129.032 172.593,122.682 173.123,122.152 173.123,121.697 173.546,121.274 J4.2
BK4: IC1.68 J5.2 | length 25.2
  Top Layer w0.154: IC1.68 171.49,128.865 171.704,128.651 171.704,110.7 173.123,109.281 173.123,108.749 173.546,108.326 J5.2
BK5: IC1.66 J6.2 | length 36.6
  Top Layer w0.154: IC1.66 170.658,127.865 170.888,127.635 170.888,108.893 172.715,107.066 172.715,96.21 173.546,95.379 J6.2
BK6: IC1.64 J7.2 | length 48.1
  Top Layer w0.154: IC1.64 169.826,126.865 170.072,126.619 170.072,108.439 171.899,106.612 171.899,94.981 172.715,94.165 172.715,83.795 173.123,83.387 173.123,82.855 173.546,82.432 J7.2
BK7: IC1.59 J8.2 | length 61.5
  Top Layer w0.154: v3(166.116,123.571) 166.166,123.621 166.647,123.621 167.391,124.365 IC1.59 ; v3(168.021,116.078) 168.802,115.297 168.894,115.297 169.256,114.935 169.256,108.043 171.083,106.216 171.083,94.643 171.899,93.827 171.899,82.034 172.715,81.218 172.715,70.316 173.546,69.485 J8.2
  Bottom Layer w0.154: v3(166.116,123.571) 166.884,123.571 168.021,122.434 v3(168.021,116.078)
DIR_485: IC1.53 IC2.2 IC2.3 R5.2 | length 40.1
  Top Layer w0.154: v5(166.878,120.523) 167.701,121.346 168.64,121.346 IC1.53
  Top Layer w0.4: IC2.3 IC2.2 159.258,89.292 160.898,90.932 R5.2 160.945,90.932 163.204,93.192 v5@163.28,93.192
  Bottom Layer w0.4: v5(163.343,93.192) 164.147,93.995 165.328,93.995 166.878,95.545 v5(166.878,120.523)
DTR: C3.2 J11.4 | length 10
  Top Layer w0.4: J11.4 155.575,97.155 155.575,103.505 155.995,103.925 156.666,103.925 156.972,104.231 C3.2
GND: C1.1 C2.1 C4.1 C5.1 C6.2 C7.1 C8.1 C9.1 D1.2 D2.3 D3.2 D4.2 IC1.11 IC1.32 IC1.62 IC1.81 IC2.5 J9.4 J11.5 J14.3 LED1.1 LED2.1 PS1.3 PS2.4 R5.1 R9.1 | length 9.7
  Top Layer w0.154: 151.384,127.381 153.159,127.381 IC1.11 ; 157.861,120.269 157.861,119.761 157.909,119.761 IC1.32 157.909,117.265 157.871,117.265 157.871,116.967 ; 164.338,135.89 164.409,135.819 IC1.81 ; 166.878,126.873 167.182,126.569 167.182,126.206 167.45,126.206 167.772,125.884 168.64,125.884 IC1.62
  Top Layer w0.4: 157.734,116.967 157.871,116.967 ; 157.861,120.269 157.988,120.269
  other v2: 120,68 124,68 128,68 132,68 136,68 140,68 144,68 148,68 152,68 172,68 176,68 122,72 126,72 130,72 134,72 138,72 142,72 146,72 150,72 154,72 162,72 170,72 178,72 182,72 120,76 124,76 128,76 132,76 140,76 148,76 152,76 164,76 168,76 176,76 180,76 150,80 154,80 170,80 174,80 182,80 156,84 168,84 180,84 162,88 166,88 170,88 174,88 182,88 148,92 156,92 164,92 168,92 176,92 170,96 178,96 148,100 160,100 168,100 176,100 146,104 154,104 170,104 174,104 178,104 182,104 120,108 124,108 128,108 132,108 136,108 144,108 148,108 152,108 160,108 164,108 168,108 180,108 122,112 126,112 130,112 134,112 146,112 174,112 182,112 120,116 128,116 132,116 136,116 144,116 152,116 176,116 180,116 174,120 182,120 148,124 160,124 180,124 150,128 158,128 162,128 166,128 174,128 178,128 182,128 160,132 164,132 172,132 176,132 150,136 154,136 158,136 162,136 170,136 178,136 182,136 128,140 132,140 140,140 152,140 156,140 160,140 164,140 172,140 176,140 126,144 130,144 134,144 138,144 142,144 154,144 158,144 162,144 170,144 174,144 182,144 128,148 132,148 136,148 140,148 152,148 156,148 160,148 164,148 168,148 180,148 126,152 130,152 134,152 138,152 142,152 154,152 158,152 162,152 170,152 174,152 182,152 128,156 132,156 136,156 140,156 152,156 156,156 160,156 164,156 168,156 172,156 176,156 180,156 126,160 130,160 134,160 142,160 146,160 154,160 158,160 162,160 166,160 178,160 182,160 128,164 132,164 136,164 140,164 144,164 148,164 152,164 156,164 160,164 164,164 168,164 172,164 176,164
  other v3: 155.321,109.347
NetC3_1: C3.1 J12.2 R8.2 | length 5.7
  Top Layer w0.4: C3.1 R8.2 159.131,102.478 160.517,101.092 J12.2
NetC4_2: C4.2 IC1.33 Y1.1 | length 11.2
  Top Layer w0.154: IC1.33 158.428,118.596 158.428,117.651 158.977,117.102 Y1.1
  Top Layer w0.4: C4.2 154.195,112.412 155.556,112.412 v5(155.573,112.395)
  Bottom Layer w0.4: v5(155.573,112.395) 155.637,112.459 158.913,112.459 Y1.1
NetC5_2: C5.2 IC1.34 Y1.2 | length 14.2
  Top Layer w0.154: IC1.34 158.928,118.596 158.928,117.728 159.385,117.271 159.385,114.3 161.163,112.522 Y1.2
  Top Layer w0.4: Y1.2 163.927,112.452 167.697,112.452 167.767,112.383 C5.2
NetC10_1: C10.1 F2.2 PS3.1 RV2.2
  other v1: 25,80 30,80 35,80 40,80 45,80 27.5,85 32.5,85 42.5,85 25,90 30,90 35,90 40,90 45,90
NetC10_2: C10.2 C11.1 | length 3.8
  Top Layer w3: C11.1 C10.2
NetD2_1: D2.1 J9.2 R2.2 R3.1 | length 11.5
  Top Layer w0.4: R3.1@160.327,77.089 R3.1@160.327,76.789 ; J9.2 161.036,73.959 D2.1 159.827,75.493 159.927,75.593 160.093,75.593 160.327,75.827 R3.1@160.327,76.789 ; R2.2 161.158,75.958 R3.1@160.327,76.789
NetD2_2: D2.2 J9.3 R3.2 R4.2 | length 11.5
  Top Layer w0.4: R4.2 156.596,75.958 R3.2@157.427,76.789 ; J9.3 157.226,74.467 157.502,74.743 157.827,74.743 157.927,74.843 157.927,75.493 157.827,75.593 157.661,75.593 157.427,75.827 R3.2@157.427,76.789 ; R3.2@157.427,77.089 R3.2@157.427,76.789
NetF1_1: F1.1 F2.1 U1.1
  other v1: 26.609,96.401 34.609,96.401 24.609,100.401 28.609,100.401 32.609,100.401 36.609,100.401 26.609,104.401 30.609,104.401 34.609,104.401 38.609,104.401 24.609,108.401 28.609,108.401 32.609,108.401 36.609,108.401 40.609,108.401 26.609,112.401 30.609,112.401 34.609,112.401 38.609,112.401 42.609,112.401 46.609,112.401 24.609,116.401 28.609,116.401 32.609,116.401 36.609,116.401 40.609,116.401 44.609,116.401 48.609,116.401 26.609,120.401 30.609,120.401 34.609,120.401 38.609,120.401 42.609,120.401 46.609,120.401 50.609,120.401 54.609,120.401 24.609,124.401 28.609,124.401 32.609,124.401 36.609,124.401 40.609,124.401 44.609,124.401 48.609,124.401 52.609,124.401 26.609,128.401 30.609,128.401 34.609,128.401 38.609,128.401 42.609,128.401 46.609,128.401 50.609,128.401 54.609,128.401 24.609,132.401 28.609,132.401 32.609,132.401 36.609,132.401 40.609,132.401 44.609,132.401 48.609,132.401 52.609,132.401 26.609,136.401 30.609,136.401 34.609,136.401 38.609,136.401 42.609,136.401 46.609,136.401 50.609,136.401 24.609,140.401 28.609,140.401 32.609,140.401 36.609,140.401 40.609,140.401 44.609,140.401 48.609,140.401 52.609,140.401 56.609,140.401 26.609,144.401 30.609,144.401 34.609,144.401 38.609,144.401 42.609,144.401 46.609,144.401 50.609,144.401 54.609,144.401 58.609,144.401 24.609,148.401 28.609,148.401 32.609,148.401 36.609,148.401 40.609,148.401 44.609,148.401 48.609,148.401 52.609,148.401 56.609,148.401 60.609,148.401 26.609,152.401 30.609,152.401 34.609,152.401 38.609,152.401 42.609,152.401 46.609,152.401 50.609,152.401 54.609,152.401 58.609,152.401 24.609,156.401 28.609,156.401 32.609,156.401 36.609,156.401 40.609,156.401 44.609,156.401 48.609,156.401 52.609,156.401 26.609,160.401 30.609,160.401 34.609,160.401 38.609,160.401 42.609,160.401 46.609,160.401 50.609,160.401 54.609,160.401 58.609,160.401 24.609,164.401 28.609,164.401 32.609,164.401 36.609,164.401 40.609,164.401 44.609,164.401 48.609,164.401 52.609,164.401 56.609,164.401 60.609,164.401
NetF1_2: F1.2 R11.2 RV1.2
  other v1: 60,136 64,136 62,140 64,144
NetIC1_54: IC1.54 R6.2 | length 53.7
  Top Layer w0.154: v3(150.383,121.158) 150.383,121.146 150.082,120.845 150.082,89.567 151.384,88.265 R6.2 ; v3(165.608,121.539) 165.658,121.589 167.138,121.589 167.414,121.865 IC1.54
  Bottom Layer w0.154: v3(150.383,121.158) 151.018,121.793 165.295,121.793 165.549,121.539 v3(165.608,121.539)
NetIC1_55: IC1.55 R7.2 | length 54.7
  Top Layer w0.154: R7.2 148.971,86.879 149.606,87.514 v3(149.606,122.174) ; v3@166.816,122.365 IC1.55
  Bottom Layer w0.154: v3(149.606,122.174) 149.633,122.201 158.124,122.201 158.289,122.366 v3(166.816,122.366)
NetIC2_6: IC2.6 R4.1 | length 5.5
  Top Layer w0.4: R4.1@155.448,77.862 155.448,77.839 155.552,77.839 157.988,80.275 IC2.6
NetIC2_7: IC2.7 R2.1 | length 5.8
  Top Layer w0.4: IC2.7 159.258,80.783 162.306,77.735 R2.1
NetJ10_1: J10.1 U1.2
  other v1: 88,156 92,156 96,156 100,156 104,156 108,156 90,160 94,160 98,160 102,160 106,160 88,164 92,164 96,164 100,164 104,164 108,164
NetLED1_2: LED1.2 R6.1 | length 2.3
  Top Layer w0.4: LED1.2 R6.1
NetLED2_2: LED2.2 R7.1 | length 2.3
  Top Layer w0.4: LED2.2 R7.1
NetPS1_1: PS1.1 R11.1
  other v1: 72,135 75,135 78,135 70.5,138 73.5,138
NetPS2_1: PS2.1 PS3.4
  other v1: 55,85 52.5,90 57.5,90 55,95 42.5,100 47.5,100 52.5,100 57.5,100 67.5,100 45,105 50,105 55,105 60,105 65,105
PGND: C11.2 J10.2 PS1.2 PS2.2 PS3.2 PS3.3 R9.2 RV1.1 RV2.1
  other v1: 27,72 36,72 45,72 54,72 63,72 72,72 81,72 90,72 99,72 108,72 117,72 58.5,81 67.5,81 76.5,81 85.5,81 94.5,81 103.5,81 112.5,81 63,90 72,90 81,90 90,90 99,90 108,90 117,90 76.5,99 85.5,99 94.5,99 103.5,99 112.5,99 72,108 81,108 90,108 99,108 108,108 117,108 58.5,117 67.5,117 76.5,117 85.5,117 94.5,117 103.5,117 112.5,117 117,144 121.5,153 117,162
RESET: IC1.30 J12.1 | length 22.6
  Top Layer w0.154: v3(156.591,106.299) 156.55,106.34 156.55,117.205 156.89,117.544 156.89,117.942 IC1.30
  Bottom Layer w0.154: v3(156.591,106.299) 159.385,106.299 J12.1
RX1: IC1.45 IC2.1 J11.3 R1.1 | length 41
  Top Layer w0.154: v3(164.221,115.665) 164.259,115.704 164.259,116.38 164.409,116.53 IC1.45
  Top Layer w0.4: v5(158.242,93.726) 158.357,93.841 158.357,94.603 J11.3 ; v5(161.561,89.264) 161.561,89.146 160.528,88.113 IC2.1 160.528,87.235 160.653,87.11 161.313,87.11 162.56,85.863 R1.1
  Bottom Layer w0.154: J11.3@159.512,95.885 162.43,98.803 164.627,98.803 165.894,100.069 165.894,113.992 v3(164.221,115.665)
  Bottom Layer w0.4: v5(158.242,93.726) 161.447,90.521 161.447,89.378 v5@161.544,89.281 ; J11.3 J11.3@159.512,95.885
SC0: IC1.78 J1.1 | length 33
  Top Layer w0.154: IC1.78 165.909,156.003 172.021,162.115 J1.1
SC1: IC1.76 J2.1 | length 19.3
  Top Layer w0.154: IC1.76 166.909,143.414 172.663,149.168 J2.1
SC2: IC1.74 J3.1 | length 7.8
  Top Layer w0.154: IC1.74 168.678,131.884 169.546,131.884 173.123,135.461 173.123,135.798 173.546,136.221 J3.1
SC3: IC1.72 J4.1 | length 12.2
  Top Layer w0.154: IC1.72 171.522,130.865 173.101,129.286 173.101,124.669 173.123,124.647 173.123,123.697 173.546,123.274 J4.1
SC4: IC1.69 J5.1 | length 23.9
  Top Layer w0.154: IC1.69 171.625,129.365 172.112,128.878 172.112,111.479 172.905,110.686 174.137,110.686 J5.1
SC5: IC1.67 J6.1 | length 35.4
  Top Layer w0.154: IC1.67 171.201,128.365 171.296,128.27 171.296,109.108 173.123,107.281 173.123,97.802 173.546,97.379 J6.1
SC6: IC1.65 J7.1 | length 46.8
  Top Layer w0.154: IC1.65 170.242,127.365 170.48,127.127 170.48,108.724 172.307,106.897 172.307,95.15 173.123,94.334 173.123,84.855 173.546,84.432 J7.1
SC7: IC1.60 J8.1 | length 59.8
  Top Layer w0.154: v3(166.243,124.841) 166.267,124.865 IC1.60 ; v3@169.164,116.078 v3(169.164,116.074) 169.164,116.07 169.664,115.57 169.664,108.212 171.491,106.385 171.491,94.812 172.307,93.996 172.307,82.203 173.123,81.387 173.123,71.908 173.546,71.485 J8.1
  Bottom Layer w0.154: v3(166.243,124.841) 169.164,121.92 v3(169.164,116.074)
TX1: IC1.46 IC2.4 J11.2 | length 35.6
  Top Layer w0.154: IC1.46 164.909,116.269 v3(165.354,115.824)
  Top Layer w0.4: IC2.4 156.718,90.424 J11.2
  Bottom Layer w0.154: J11.2@162.052,95.885 164.084,97.917 164.319,97.917 166.302,99.9 166.302,114.876 v3(165.354,115.824)
  Bottom Layer w0.4: J11.2 J11.2@162.052,95.885
pads on no net: IC1.1 IC1.2 IC1.3 IC1.4 IC1.5 IC1.6 IC1.7 IC1.8 IC1.9 IC1.12 IC1.13 IC1.14 IC1.15 IC1.16 IC1.17 IC1.18 IC1.19 IC1.20 IC1.21 IC1.22 IC1.23 IC1.24 IC1.25 IC1.26 IC1.27 IC1.28 IC1.29 IC1.35 IC1.36 IC1.37 IC1.38 IC1.39 IC1.40 IC1.41 IC1.42 IC1.43 IC1.44 IC1.47 IC1.48 IC1.49 IC1.50 IC1.51 IC1.52 IC1.56 IC1.57 IC1.58 IC1.63 IC1.70 IC1.79 IC1.82 IC1.83 IC1.84 IC1.85 IC1.86 IC1.87 IC1.88 IC1.89 IC1.90 IC1.91 IC1.92 IC1.93 IC1.94 IC1.95 IC1.96 IC1.97 IC1.98 IC1.99 IC1.100 J1.S1 J1.S2 J2.S1 J2.S2 J3.S1 J3.S2 J4.S1 J4.S2 J5.S1 J5.S2 J6.S1 J6.S2 J7.S1 J7.S2 J8.S1 J8.S2

## Polygon pours and split planes (outlines as drawn)
PGND on Top Layer "PGND_TOP" (solid, pour order 23): 123.952,167.386 22.225,167.386 22.225,63.881 118.237,63.881 118.237,138.811 123.952,138.811
GND on Top Layer "GND_TOP" (solid, pour order 24): 118.491,167.132 118.491,63.881 183.896,63.881 183.896,167.513
+12V on Top Layer "12V_TOP" (solid, pour order 14): 131.762,103.632 128.397,100.266 128.397,96.139 118.237,96.139 118.237,77.597 145.288,77.597 145.288,103.632
NetC10_1 on Top Layer "C10_1_TOP" (solid, pour order 21): 22.754,95.173 22.754,77.012 49.678,77.012 49.678,94.919
NetPS2_1 on Top Layer "PS2_1_TOP" (solid, pour order 22): 59.563,83.439 59.563,97.663 70.739,97.663 70.739,111.887 49.149,111.887 38.862,101.6 38.862,95.25 49.911,95.25 49.911,83.439
+5V on Top Layer "5V_TOP" (solid, pour order 13): 142.748,120.142 118.237,120.142 118.237,138.43 145.288,138.43
NetPS1_1 on Top Layer "PS1_1_TOP" (solid, pour order 4): 67.31,141.224 118.11,141.224 118.11,119.126 67.31,119.126
+5V on Top Layer "mini_5V_TOP" (solid, pour order 17): 160.02,84.963 160.02,80.772 166.116,80.772 166.116,84.836
NetF1_2 on Top Layer "F1_2_TOP" (solid, pour order 2): 67.056,147.828 60.96,147.828 55.245,142.113 55.245,119.126 67.056,119.126
NetF1_1 on Top Layer "F1_1_TOP" (solid, pour order 1): 55.245,118.872 38.354,101.981 38.354,95.123 22.284,95.123 22.388,167.513 65.532,167.513 65.532,148.082 55.245,137.795
NetJ10_1 on Top Layer "J10_1_TOP" (solid, pour order 0): 113.284,167.513 113.284,141.478 65.659,141.478 65.659,167.513
PGND on Bottom Layer "PGND_BOT" (solid, pour order 19): 22.225,167.132 123.952,167.132 123.952,136.906 118.237,131.191 118.237,63.881 22.225,63.881
GND on Bottom Layer "GND_BOT" (solid, pour order 20): 116.078,167.132 116.078,64.212 183.896,64.212 183.896,167.64
NetC10_1 on Bottom Layer "C10_1_BOT" (solid, pour order 18): 22.733,95.123 22.733,76.962 49.657,76.962 49.657,94.869
+12V on Bottom Layer "12V_BOT" (solid, pour order 15): 118.237,77.597 145.288,77.597 145.288,96.901 118.237,96.901
NetPS2_1 on Bottom Layer "PS2_1_BOT" (solid, pour order 16): 59.563,83.439 59.563,97.663 70.739,97.663 70.739,111.887 49.149,111.887 38.862,101.6 38.862,95.25 49.911,95.25 49.911,83.439
+5V on Bottom Layer "+5V_BOT" (solid, pour order 12): 118.237,138.303 145.288,138.303 145.288,120.142 118.237,120.142
NetPS1_1 on Bottom Layer "PS1_1_BOT" (solid, pour order 10): 67.183,132.715 81.153,132.715 81.153,142.367 67.183,142.367
NetF1_2 on Bottom Layer "F1_2_BOT" (solid, pour order 8): 55.372,132.715 67.183,132.715 67.183,148.971 55.372,148.971
NetF1_1 on Bottom Layer "F1_1_BOT" (solid, pour order 7): 38.354,101.981 38.354,94.996 22.225,94.996 22.225,167.386 66.998,167.386 67.114,149.557 55.372,137.668 55.372,118.999
NetJ10_1 on Bottom Layer "J10_1_BOT" (solid, pour order 6): 113.284,167.259 85.471,167.259 85.471,151.638 113.284,151.638

## Keep-outs
Keep-Out Layer:
  the board outline again, w0.254

## Dimensions
22.225,63.754 to 22.225,167.767 on Mechanical 15
184.15,63.754 to 22.225,63.754 on Mechanical 15